# EAGLE board DMDConnector edit (EAGLE 6.4)
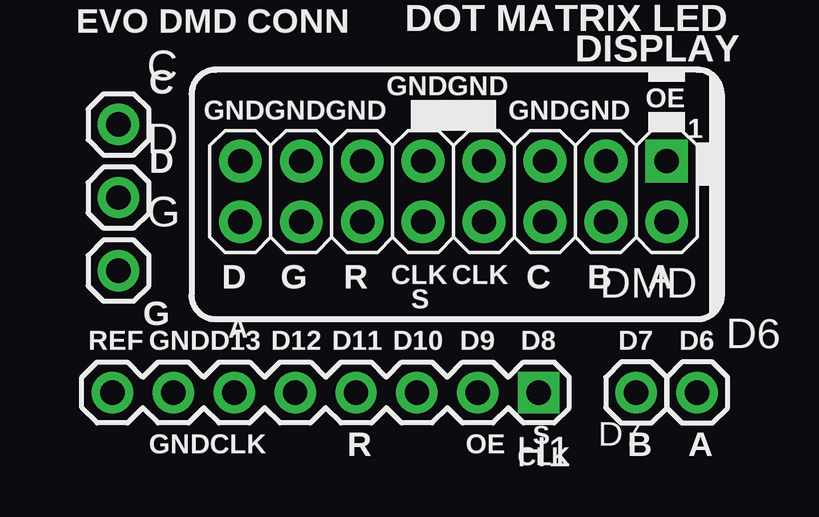
[diagram p0: board, top side]
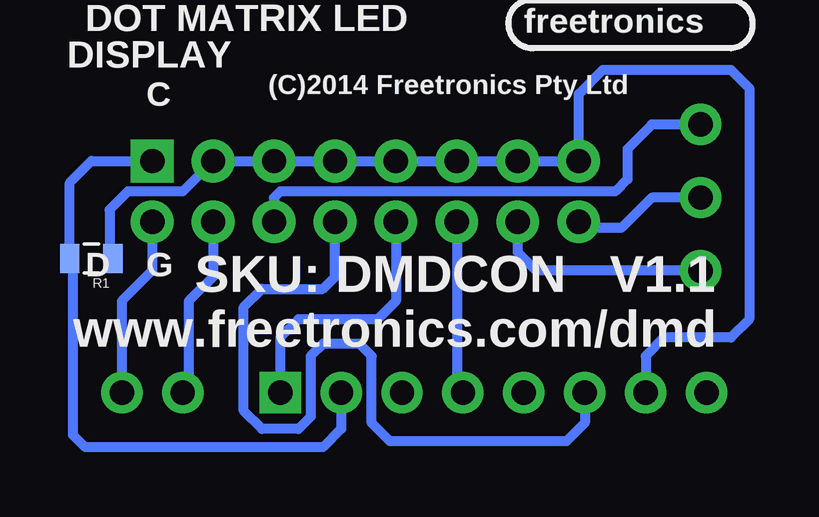
[diagram p1: board, bottom side, seen from below]

No outline drawn. Coordinates in mm, seen from the top.
Copper layers (1*16): Top 0.035mm / dielectric 1.5mm / Bottom 0.035mm
Design rules "default *": minimum track width 8mil, minimum drill 15mil, track to track 10mil, track to pad 10mil, pad to pad 10mil, via to via 10mil, smd to smd 8mil, copper to edge 10mil, drill to drill 8mil, minimum pad ring 14mil, minimum via ring 8mil, stop-mask expansion 4mil, vias tented up to drill 25mil, thermal gap 10mil

## Footprints (pad centres in the part's own frame; a part is rotated, then mirrored left to right if it is on the bottom)
1X01 = drill 1.016: 1 0,0
2X8-SMALLERPADS = drill 1.016 pad 1.778 square: 1 0,0 | drill 1.016 pad 1.778: 2 0,2.54; 3 2.54,0; 4 2.54,2.54; 5 5.08,0; 6 5.08,2.54; 7 7.62,0; 8 7.62,2.54; 9 10.16,0; 10 10.16,2.54; 11 12.7,0; 12 12.7,2.54; 13 15.24,0; 14 15.24,2.54; 15 17.78,0; 16 17.78,2.54
1X08 = drill 1.016 square: 1 0,0 | drill 1.016: 2 2.54,0; 3 5.08,0; 4 7.62,0; 5 10.16,0; 6 12.7,0; 7 15.24,0; 8 17.78,0
0805 = smd 0.8 x 1.2: 1 -0.9,0; 2 0.9,0

## Placement (x,y rotation side)
C  M01PTH  [1X01]  3.3,14.48 0 top
D  M01PTH  [1X01]  3.3,11.43 0 top
D6  M01PTH  [1X01]  27.43,3.3 0 top
D7  M01PTH  [1X01]  24.89,3.3 0 top
DMD  M08X2  [2X8-SMALLERPADS]  26.16,12.95 180 top
G  M01PTH  [1X01]  3.3,8.38 0 top
H1  Digital_8_13  [1X08]  20.83,3.3 180 top
R1  10K  [0805]  28.7,8.89 180 bottom

## Library data of the parts
C D D6 D7 DMD G = freetronics-master-v1
H1 = freetronics
R1 = freetronics-master-v1.1

## Nets
AREF: H1.8
C: C.1 DMD.6
D: D.1 DMD.16
D6: D6.1 DMD.2
D7: D7.1 DMD.4
D8: DMD.10 H1.1
D9: DMD.1 H1.2 R1.2
D10_SS: H1.3
D11_MOSI: DMD.12 H1.4
D12_MISO: H1.5
D13_SCK: DMD.8 H1.6
G: DMD.14 G.1
GND: DMD.3 DMD.5 DMD.7 DMD.9 DMD.11 DMD.13 DMD.15 H1.7 R1.1

## Tracks (layer width: path | path; a pad name or v marks a point on that pad's centre or on a via)
C
  Bottom 0.406: C.1 5.33,14.48 6.35,13.46 6.35,12.19 6.86,11.68 20.83,11.68 21.08,11.43 DMD.6
D
  Bottom 0.406: D.1 5.33,11.43 6.6,10.16 8.13,10.16 DMD.16
D6
  Bottom 0.406: DMD.2 26.16,8.38 27.43,7.11 D6.1
D7
  Bottom 0.406: DMD.4 23.62,8.13 24.64,7.11 24.64,3.56 D7.1
D8
  Bottom 0.406: DMD.10 16,7.11 16.76,6.35 20.07,6.35 20.83,5.59 H1.1
D9
  Bottom 0.406: H1.2 18.29,1.78 19.05,1.02 28.96,1.02 29.46,1.52 29.46,8.75 R1.2 29.6,12.05 28.7,12.95 DMD.1
D11_MOSI
  Bottom 0.406: DMD.12 13.46,3.56 H1.4
D13_SCK
  Bottom 0.406: H1.6 8.13,2.03 8.89,1.27 16.26,1.27 17.02,2.03 17.02,4.83 17.53,5.33 19.05,5.33 19.56,4.83 19.56,2.29 20.07,1.78 21.59,1.78 22.35,2.54 22.35,6.86 21.59,7.62 19.05,7.62 18.54,8.13 DMD.8
G
  Bottom 0.406: G.1 10.16,8.38 10.92,9.14 DMD.14
GND
  Bottom 0.406: H1.7 5.59,4.83 4.83,5.59 2.03,5.59 1.27,6.35 1.27,16 2.03,16.76 7.37,16.76 8.38,15.75 DMD.15 DMD.13 DMD.11 DMD.9 DMD.7 DMD.5 DMD.3 24.89,11.68 27.18,11.68 27.94,10.92 27.94,9.03 R1.1

## Text on the board
tPlace: EVO DMD CONN | DOT MATRIX LED | DISPLAY | GND | GND | C | OE | GND | GND | GND | GND | GND | 1 | D | D | G | R | CLK | CLK | C | B | A | S | G | A | REF | GND | D13 | D12 | D11 | D10 | D9 | D8 | D7 | D6 | GND | CLK | R | OE | S | B | A | CLK
bPlace: freetronics | DOT MATRIX LED | DISPLAY | (C)2014 Freetronics Pty Ltd | C | G | D | SKU: DMDCON V1.1 | www.freetronics.com/dmd